# Altium PCB WT-312.pcbdoc
Units mm, origin at the board's own origin, x right, y up, seen from the top; angles counter-clockwise.
Board outline 50 x 25 mm, 2 copper layers (Top Layer, Bottom Layer); 40 components, 26 nets, 105 pads, 36 vias.
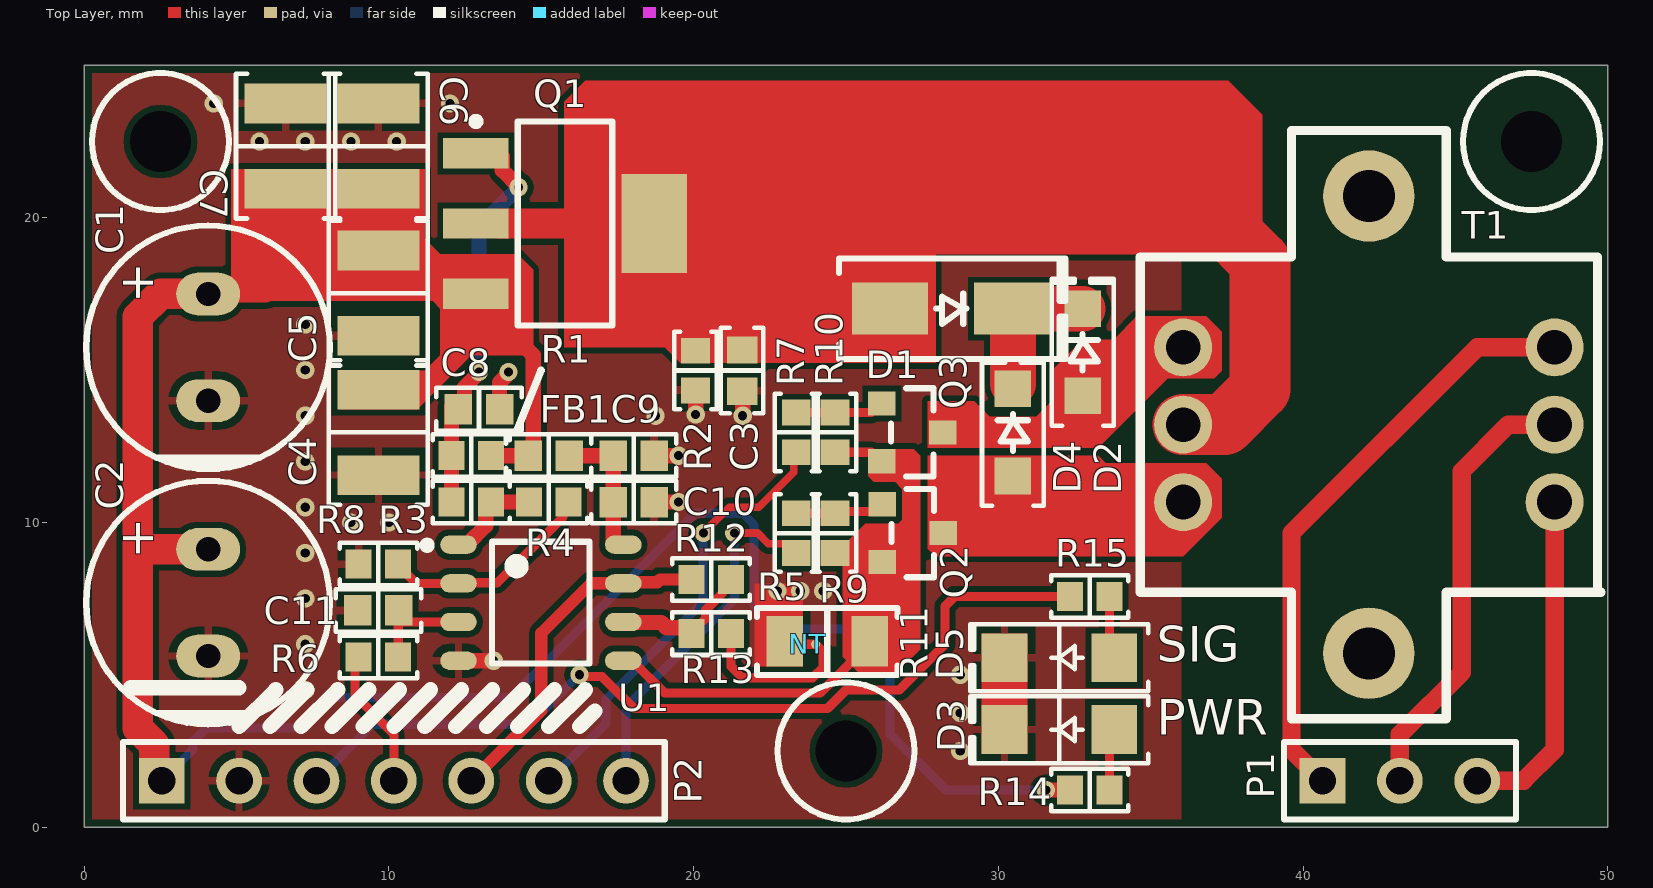
[diagram p0: Top Layer view]
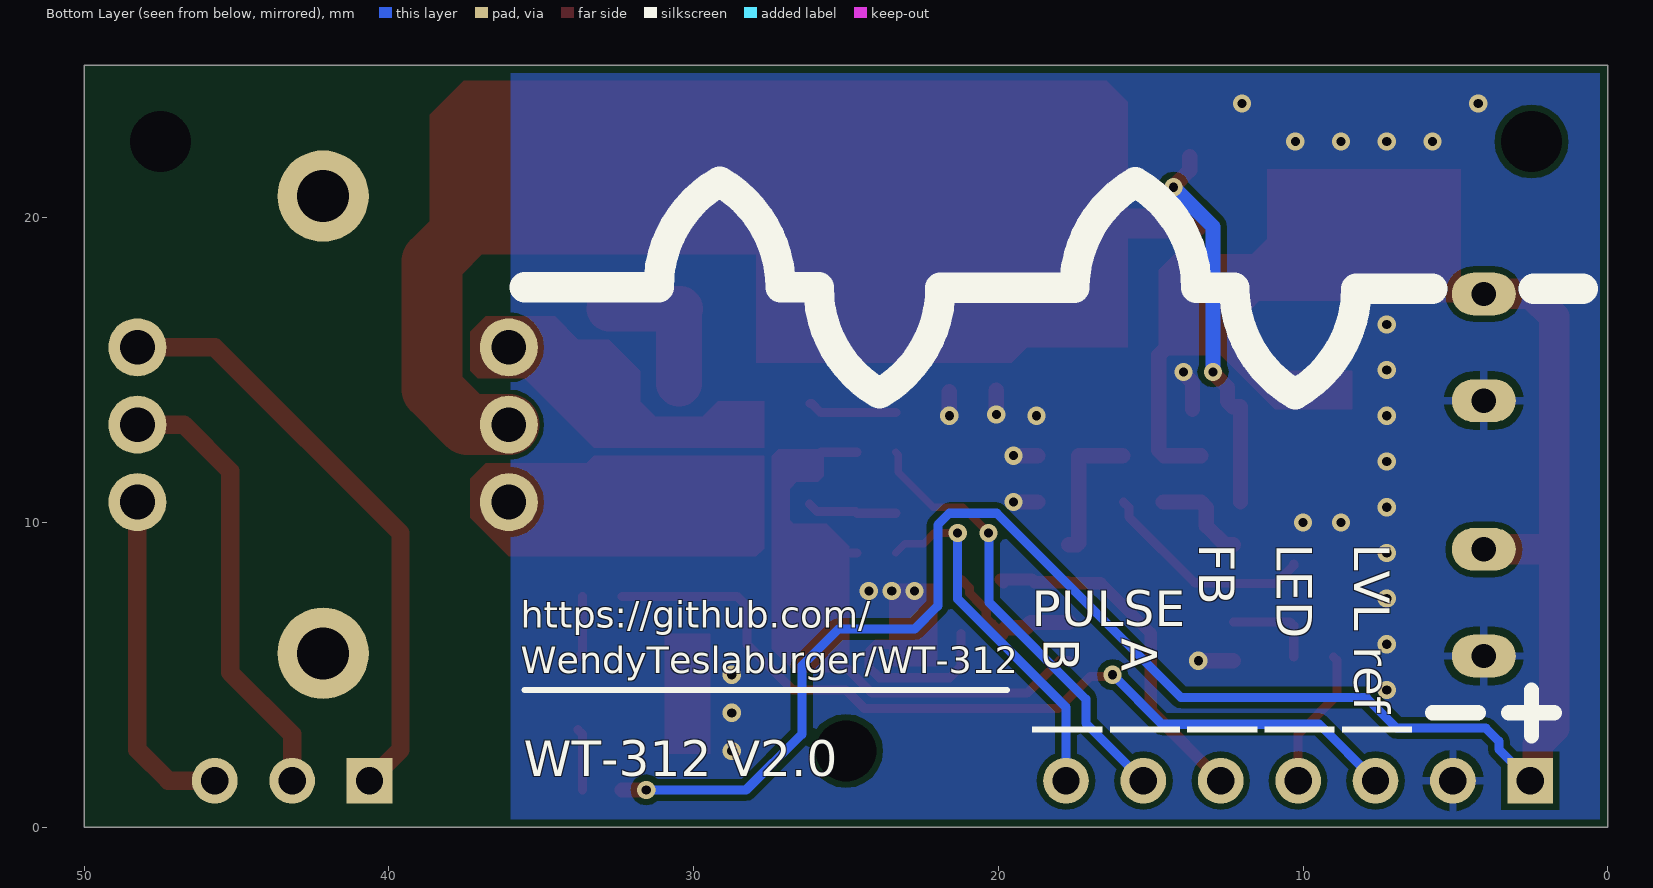
[diagram p1: Bottom Layer view, seen from below]
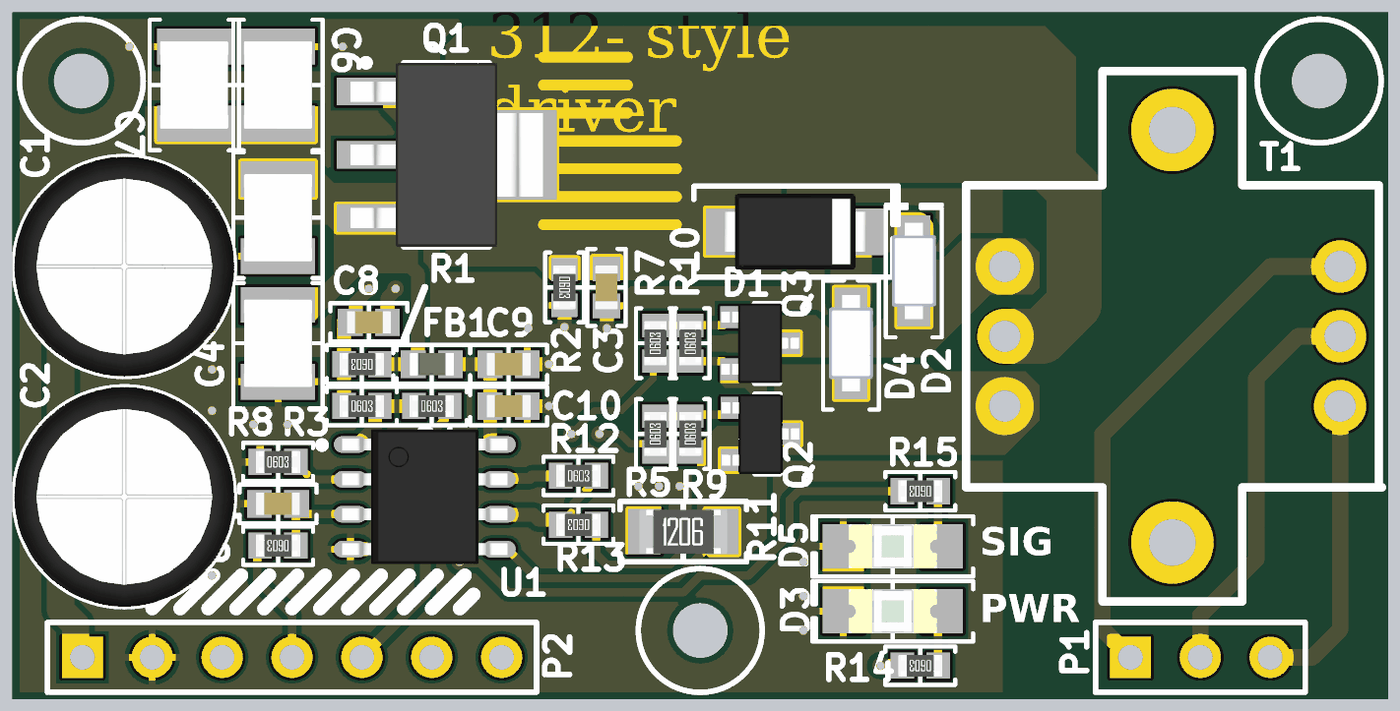
[diagram p2: 3D render of the assembled board from above, using the file's embedded part models]

## Layer stack, top to bottom
Top Solder: solder mask 0.0102, Solder Resist, Dk 3.5
Top Layer: signal copper 0.0356
Dielectric 1: dielectric 0.32, FR-4, Dk 4.8
Bottom Layer: signal copper 0.0356
Bottom Solder: solder mask 0.0102, Solder Resist, Dk 3.5

## Board outline
0,0 50,0 50,25 0,25

## Design rules (kind name [scope] priority, off if disabled: settings)
BoardOutlineClearance [All] p1: gap=0.25 ignorepadtopadclearanceinfootprint=FALSE
Clearance [All] p1: gap=0.2 ignorepadtopadclearanceinfootprint=FALSE
ComponentClearance ComponentClearance_1 [InComponent('T1')] p1: gap=0 collisioncheckmode=3 verticalgap=0 showdistances=FALSE
ComponentClearance ComponentClearance_2 [InComponent('NT')] p2: gap=0 collisioncheckmode=3 verticalgap=0 showdistances=FALSE
ComponentClearance [All] p3: gap=0.254 collisioncheckmode=3 verticalgap=0.254 showdistances=FALSE
MinimumSolderMaskSliver [All] p1: minsoldermaskwidth=0.2
PolygonConnect [All] p1: thpad.connectstyle=Relief thpad.reliefconductorwidth=0.254 thpad.reliefentries=4 thpad.polygonreliefangle="90 Angle" thpad.airgapwidth=0.254 smdpad.connectstyle=Relief smdpad.reliefconductorwidth=0.254 smdpad.reliefentries=4 smdpad.polygonreliefangle="90 Angle" smdpad.airgapwidth=0.254 via.connectstyle=Direct via.reliefconductorwidth=0.254 via.reliefentries=4 via.polygonreliefangle="90 Angle" via.airgapwidth=0.254
RoutingVias [All] p1: holewidth=0.711 width=1.27 viastyle="Through Hole" minholewidth=0.711 minwidth=1.27 maxholewidth=0.711 maxwidth=1.27
ShortCircuit ShortCircuit_1 [InComponent('NT')] p1: allowed=TRUE
ShortCircuit [All] p2: allowed=FALSE
SilkToSilkClearance [All] p1: silktosilkclearance=0
SilkToSolderMaskClearance [IsPad] p1: minsilkscreentomaskgap=0.1 clearancetoexposedcopper=TRUE
SolderMaskExpansion [All] p1: expansion=0.102 istentingtop=FALSE
Width [All] p1: maxlimit=2 minlimit=0.254 preferedwidth=0.254
25 further rules are at their usual default settings.

## Components (designator, comment, footprint, x,y, rotation, side; value= is the part's Value field where it differs from the comment)
C1 "470µF" "CAP TH ALUM ELEC D8.00mm S3.50mm H13.00mm" 4.064,15.748 r90 top
C2 "470µF" "CAP TH ALUM ELEC D8.00mm S3.50mm H13.00mm" 4.064,7.366 r90 top
C3 "0.1µF" "CAP 0603_1608" 21.59,14.986 r90 top
C4 "22µF" "CAP 1210_3225 - 2.8MM" 9.652,12.954 r90 top
C5 "22µF" "CAP 1210_3225 - 2.8MM" 9.652,17.526 r90 top
C6 "22µF" "CAP 1210_3225 - 2.8MM" 9.652,22.352 r270 top
C7 "22µF" "CAP 1210_3225 - 2.8MM" 6.604,22.352 r270 top
C8 "0.1µF" "CAP 0603_1608" 12.954,13.716 r180 top
C9 "0.1µF" "CAP 0603_1608" 18.034,12.192 r180 top
C10 "1µF" "CAP 0603_1608" 18.034,10.668 r180 top
C11 "1µF" "CAP 0603_1608" 9.652,7.112 r0 top
D1 "SML4746-E3/61" "DO214AC SMA" 28.448,17.018 r0 top
D2 "DSS14UTR" SOD123F 32.766,15.588 r90 top
D3 "Green" "LED 1206_3216 GREEN" 32,3.2 r180 top
D4 "DSS14UTR" SOD123F 30.48,12.954 r90 top
D5 "Green" "LED 1206_3216 GREEN" 32,5.563 r180 top
FB1 "100 Ohms @ 100MHz" "FER 0603_1608" 15.24,12.192 r0 top
NT "NetTie 0.3mm" NetTie0.3mm 23.75,6 r180 top
P1 "Header 3" HDR1X3 40.64,1.524 r0 top
P2 "Header 7" HDR1X7 2.54,1.524 r0 top
Q1 "NTF2955" SOT230P700X175-4N 15.777,19.812 r0 top
Q2 "DMN2041L-7" "DIODES SOT-23-3" 27.194,9.652 r0 top
Q3 "DMN2041L-7" "DIODES SOT-23-3" 27.178,12.954 r0 top
R1 "1 kOhms" "RES 0603_1608" 12.7,12.192 r180 top
R2 "1 kOhms" "RES 0603_1608" 20.066,14.986 r270 top
R3 "1 kOhms" "RES 0603_1608" 12.7,10.668 r0 top
R4 "1 kOhms" "RES 0603_1608" 15.24,10.668 r0 top
R5 "10 Ohms" "RES 0603_1608" 23.368,9.652 r90 top
R6 "10 kOhms" "RES 0603_1608" 9.652,5.588 r180 top
R7 "10 Ohms" "RES 0603_1608" 23.368,12.954 r90 top
R8 "10 kOhms" "RES 0603_1608" 9.652,8.636 r0 top
R9 "10 kOhms" "RES 0603_1608" 24.638,9.652 r90 top
R10 "10 kOhms" "RES 0603_1608" 24.638,12.954 r90 top
R11 "100 mOhms" "RES 1206_3216" 24.384,6.096 r0 top
R12 "100 kOhms" "RES 0603_1608" 20.574,8.128 r0 top
R13 "10 kOhms" "RES 0603_1608" 20.574,6.35 r180 top
R14 "560 Ohms" "RES 0603_1608" 33,1.219 r180 top
R15 "560 Ohms" "RES 0603_1608" 33,7.569 r180 top
T1 "42TL004" 42TL-Series 42.164,13.208 r0 top
U1 "LMC64822" SOIC127P490X175-8N 14.986,7.366 r0 top

## Footprints (in the part's own frame and the unit in brackets; to place one, negate y for a bottom-side part, rotate by r counter-clockwise, add the part's x,y. Pads: shape width x height; smd on the part's side, far side on the other; paste and mask are expansions set on the pad)
42TL-Series [mil] "Miniature transformers"
  round 75 hole 45: 1(-240,100) 2(-240,0) 3(-240,-100) 4(240,-100) 5(240,0) 6(240,100)
  round 118.11 hole 66.93: MC1(0,-295.5) MC2(0,295.5)
  silkscreen extent -296,-380 300,380
"CAP 0603_1608" [mm] "Chip Capacitor, 2-Leads, Body 1.60x0.80mm, IPC Medium Density"
  rect 0.9x1 smd: 1(-0.675,0) 2(0.675,0)
  silkscreen extent -1.4,-0.7 1.4,0.7, body extent -0.8,-0.41 0.8,0.41, height 0.82
"CAP 1210_3225 - 2.8MM" [mm] "Chip Capacitor, 2-Leads, Body 3.20x2.50mm, IPC Medium Density"
  rect 1.3x2.7 smd: 1(-1.4,0) 2(1.4,0)
  silkscreen extent -2.37,-1.63 2.37,1.63, body extent -1.6,-1.25 1.6,1.25, height 2.8
"CAP TH ALUM ELEC D8.00mm S3.50mm H13.00mm" [mm] "8mm Diameter 3.5mm Lead Spacing Aluminum Electrolytic Capacitors Radial, Can"
  oval 1.4x2.1 hole 0.8: 1(1.75,0) 2(-1.75,0)
  silkscreen extent -4,-4 4,4, body extent -4.01,-4 4,4, height 13
"DIODES SOT-23-3" [mm] "SOT23, 3-Leads, Body 2.90x2.40mm, Pitch 0.95mm, IPC Medium Density"
  rect 0.9x0.8 smd: 1(-1,0.95) 2(-1,-0.95) 3(1,0)
  silkscreen extent -0.7,-1.45 0.7,1.45, body extent -1.41,-1.45 1.41,1.45, height 1.5
"DO214AC SMA" [mm] "Molded Diode, 2-Leads, Body 4.30x2.60mm, IPC Medium Density"
  rect 2.5x1.7 smd: 1(-2,0) 2(2,0)
  silkscreen extent -3.68,-1.65 3.75,1.65, body extent -2.6,-1.37 2.6,1.37, height 2.4
"FER 0603_1608" [mm] "Chip Ferrite, 2-Leads, Body 1.60x0.80mm, IPC Medium Density"
  rect 0.9x1 smd: 1(-0.675,0) 2(0.675,0)
  silkscreen extent -1.4,-0.7 1.4,0.7, body extent -0.8,-0.41 0.8,0.41, height 0.82
HDR1X3 [mm] "Connector; Header; 3 Position"
  rect 1.5x1.5 hole 0.9: 1(0,0)
  round 1.5 hole 0.9: 2(2.54,0) 3(5.08,0)
  silkscreen extent -1.27,-1.27 6.35,1.27
HDR1X7 [mm] "Connector; Header; 7 Position"
  rect 1.5x1.5 hole 0.9: 1(0,0)
  round 1.5 hole 0.9: 2(2.54,0) 3(5.08,0) 4(7.62,0) 5(10.16,0) 6(12.7,0) 7(15.24,0)
  silkscreen extent -1.27,-1.27 16.51,1.27
"LED 1206_3216 GREEN" [mm] "Chip Diode, 2-Leads, Body 3.13x1.55mm, IPC Medium Density"
  rect 1.5x1.6 smd: 1(-1.8,0) 2(1.8,0)
  silkscreen extent -2.92,-1.1 2.92,1.1, body extent -1.6,-0.8 1.6,0.8, height 0.9
NetTie0.3mm [mm]
  round 0.3 smd paste+0 mask+0: 1(-0.25,0) 2(0.25,0)
  Top Layer lines w0.3: 0.25,0 -0.25,0
"RES 0603_1608" [mm] "Chip Resistor, 2-Leads, Body 1.60x0.80mm, IPC Medium Density"
  rect 0.85x0.95 smd: 1(-0.65,0) 2(0.65,0)
  silkscreen extent -1.27,-0.7 1.27,0.7, body extent -0.8,-0.4 0.8,0.4, height 0.45
"RES 1206_3216" [mm] "Chip Resistor, 2-Leads, Body 3.13x1.55mm, IPC Medium Density"
  rect 1.2x1.65 smd: 1(-1.4,0) 2(1.4,0)
  silkscreen extent -2.3,-1.1 2.3,1.1, body extent -1.6,-0.8 1.6,0.8, height 0.6
SOD123F [mm] "SODFL, 2-Leads, Body 1.60x3.50mm, IPC Medium Density"
  rect 1.2x1.2 smd: 1(-1.43,0) 2(1.43,0)
  silkscreen extent -2.41,-1.02 2.41,1.02, body extent -1.75,-0.8 1.75,0.8, height 1.1
SOIC127P490X175-8N [mm] "SOIC, 8-Leads, Body 3.90x3.90mm, Pitch 1.27mm, IPC Medium Density"
  oval 1.2x0.6 smd: 1(-2.704,1.905) 2(-2.704,0.635) 3(-2.704,-0.635) 4(-2.704,-1.905) 5(2.704,-1.905) 6(2.704,-0.635) 7(2.704,0.635) 8(2.704,1.905)
  silkscreen extent -3.86,-2 1.6,2.01, body extent -3,-2.45 3,2.45, height 1.91
SOT230P700X175-4N [mm] "SOT223, 4-Leads, Body 6.50x7.00mm (avg), Pitch 2.30mm, IPC Medium Density"
  rect 2.15x1 smd: 1(-2.925,2.3) 2(-2.925,0) 3(-2.925,-2.3)
  rect 2.15x3.25 smd: 4(2.925,0)
  silkscreen extent -3.05,-3.35 1.55,3.47, body extent -3.5,-3.35 3.5,3.35, height 1.75

## Part data
C1 C2: library part 477CKE016M, "CAP ALUM 470UF 20% 16V RADIAL", Device Package="Radial, Can", ESR (Equivalent Series Resistance)="564.4mOhm @ 120Hz", Lifetime @ Temp.="2000 Hrs @ 105°C", Manufacturer="Illinois Capacitor", Operating Temperature="-40°C ~ 105°C", Ripple Current @ Low Frequency="365mA @ 120Hz", Supplier Part Number 1=1572-1744-ND, Tolerance=±20%, Voltage - Rated=16V, Applications="General Purpose", Capacitance=470µF, ComponentLink1Description=Datasheet, ComponentLink1URL=http://www.illinoiscapacitor.com/pdf/seriesDocuments/CKH_CKE%20series.pdf, ComponentLink2Description="DigiKey Link", ComponentLink2URL=http://digikey.com/product-detail/en/illinois-capacitor/477CKE016M/1572-1744-ND/5412869, Height - Seated (Max)="0.512\" (13.00mm)", LastUpdated="07/09/2020 05:24:52", Lead Spacing="0.138\" (3.50mm)", Lifecycle Status=Active, Minimum Order=1, Mounting Type="Through Hole", Package / Case="Radial, Can", Packaging=Bulk, Part Number=477CKE016M, Part Status=Active, PartId=23777, Polarization=Polar, Price=0.32, Series=CKE, Size / Dimension="0.315\" Dia (8.00mm)", Supplier 1=DigiKey
C3 C8 C9: library part C0603C104K5RAC7411, "CAP CER 0.1UF 50V X7R 0603", Device Package="0603 (1608 Metric)", Manufacturer=KEMET, Operating Temperature="-55°C ~ 125°C", Supplier Part Number 1=399-7374-2-ND, Temperature Coefficient=X7R, Tolerance=±10%, Voltage - Rated=50V, Applications="Bypass, Decoupling", Capacitance=0.1µF, ComponentLink1Description=Datasheet, ComponentLink1URL=https://api.kemet.com/component-edge/download/datasheet/C0603C104K5RAC7411.pdf, ComponentLink2Description="DigiKey Link", ComponentLink2URL=http://digikey.com/product-detail/en/kemet/C0603C104K5RAC7411/399-7374-2-ND/3317013, LastUpdated="02/09/2020 01:03:36", Lifecycle Status=Active, Minimum Order=15000, Mounting Type="Surface Mount, MLCC", Package / Case="0603 (1608 Metric)", Packaging=TapeAndReel, Part Number=C0603C104K5RAC7411, Part Status=Active, PartId=2233, Price=0.02, Series="SMD Comm X7R", Size / Dimension="0.063\" L x 0.031\" W (1.60mm x 0.80mm)", Supplier 1=DigiKey, Thickness (Max)="0.035\" (0.90mm)"
C4 C5 C6 C7: library part TMK325BJ226MM-T, "CAP CER 22UF 25V X5R 1210", Device Package="1210 (3225 Metric)", Manufacturer="Taiyo Yuden", Operating Temperature="-55°C ~ 85°C", Supplier Part Number 1=587-2086-1-ND, Temperature Coefficient=X5R, Tolerance=±20%, Voltage - Rated=25V, Applications="General Purpose", Capacitance=22µF, ComponentLink1Description=Datasheet, ComponentLink1URL=https://www.yuden.co.jp/productdata/catalog/mlcc01_e.pdf, ComponentLink2Description="DigiKey Link", ComponentLink2URL=http://digikey.com/product-detail/en/taiyo-yuden/TMK325BJ226MM-T/587-2086-1-ND/1789033, LastUpdated="02/09/2020 01:10:51", Lifecycle Status=Active, Minimum Order=1, Mounting Type="Surface Mount, MLCC", Package / Case="1210 (3225 Metric)", Packaging=TapeAndReel, Part Number=TMK325BJ226MM-T, Part Status=Active, PartId=23820, Price=0.29, Series=M, Size / Dimension="0.126\" L x 0.098\" W (3.20mm x 2.50mm)", Supplier 1=DigiKey, Thickness (Max)="0.106\" (2.70mm)"
C10 C11: library part TMJ107CB7105KAHR, "CAP CER 1UF 25V X7R 0603", Device Package="0603 (1608 Metric)", Manufacturer="Taiyo Yuden", Operating Temperature="-55°C ~ 125°C", Ratings=AEC-Q200, Supplier Part Number 1=587-4353-1-ND, Temperature Coefficient=X7R, Tolerance=±10%, Voltage - Rated=25V, Applications="Automotive, Boardflex Sensitive", Capacitance=1µF, ComponentLink1Description=Datasheet, ComponentLink1URL=https://www.yuden.co.jp/productdata/catalog//mlcc11_hq_e.pdf, ComponentLink2Description="DigiKey Link", ComponentLink2URL=http://digikey.com/product-detail/en/taiyo-yuden/TMJ107CB7105KAHR/587-4353-1-ND/5405550, Features="Soft Termination", LastUpdated="02/09/2020 01:03:31", Lifecycle Status=Active, Minimum Order=1, Mounting Type="Surface Mount, MLCC", Package / Case="0603 (1608 Metric)", Packaging=TapeAndReel, Part Number=TMJ107CB7105KAHR, Part Status=Active, PartId=4682, Price=0.04, Series=M, Size / Dimension="0.063\" L x 0.031\" W (1.60mm x 0.80mm)", Supplier 1=DigiKey, Thickness (Max)="0.035\" (0.90mm)"
D1: "DIODE ZENER 18V 1W DO214AC", Current - Reverse Leakage @ Vr="5µA @ 13.7V", Manufacturer="Vishay Semiconductor Diodes Division", Operating Temperature=150°C, Package / Case="DO-214AC, SMA", Power - Max=1W, Supplier Device Package="DO-214AC (SMA)", Supplier Part Number 1=SML4746-E3/61GICT-ND, Tolerance=±10%, Voltage - Zener (Nom) (Vz)=18V, ComponentLink1Description=Datasheet, ComponentLink1URL=//media.digikey.com/pdf/Data%20Sheets/Vishay%20Siliconix%20PDFs/SML4728-SML4764A.pdf, ComponentLink2Description="DigiKey Link", ComponentLink2URL=http://digikey.com/product-detail/en/vishay-semiconductor-diodes-division/SML4746-E3-61/SML4746-E3-61GICT-ND/8565238, Impedance (Max) (Zzt)="20 Ohms", LastUpdated="02/09/2020 01:19:18", Lifecycle Status=Active, Minimum Order=1, Mounting Type="Surface Mount", Packaging=TapeAndReel, Part Number=SML4746-E3/61, Part Status=Active, PartId=1538, Price=0.17, Series="Automotive, AEC-Q101", Supplier 1=DigiKey
D2 D4: "SCHOTTKY 40V SOD-123FL", Capacitance @ Vr, F="110pF @ 4V, 1MHz", Current - Average Rectified (Io)=1A, Current - Reverse Leakage @ Vr="100µA @ 40V", Manufacturer="SMC Diode Solutions", Operating Temperature - Junction="-55°C ~ 150°C", Package / Case=SOD-123F, Supplier Device Package=SOD-123FL, Supplier Part Number 1=1655-1927-1-ND, Voltage - DC Reverse (Vr) (Max)=40V, Voltage - Forward (Vf) (Max) @ If="500mV @ 1A", ComponentLink1Description=Datasheet, ComponentLink1URL=http://www.smc-diodes.com/propdf/DSS12U%20THRU%20DSS125U%20N1873%20REV.A.pdf, ComponentLink2Description="DigiKey Link", ComponentLink2URL=http://digikey.com/product-detail/en/smc-diode-solutions/DSS14UTR/1655-1927-1-ND/8341869, Diode Type=Schottky, LastUpdated="02/09/2020 01:19:10", Lifecycle Status=Active, Minimum Order=1, Mounting Type="Surface Mount", Packaging=TapeAndReel, Part Number=DSS14UTR, Part Status=Active, PartId=2515, Price=0.03, Series=-, Speed="Fast Recovery =< 500ns, > 200mA (Io)", Supplier 1=DigiKey
D3 D5: library part APTD3216LCGCK, "LED GREEN CLEAR 2SMD", Current - Test=2mA, Device Package="1206 (3216 Metric)", Lens Color=Colorless, Manufacturer=Kingbright, Millicandela Rating=25mcd, Supplier Device Package=2-SMD, Supplier Part Number 1=754-2049-1-ND, Voltage - Forward (Vf) (Typ)=1.9V, Color=Green, ComponentLink1Description=Datasheet, ComponentLink1URL=http://www.kingbrightusa.com/images/catalog/SPEC/APTD3216LCGCK.pdf, ComponentLink2Description="DigiKey Link", ComponentLink2URL=http://digikey.com/product-detail/en/kingbright/APTD3216LCGCK/754-2049-1-ND/7043101, Configuration=Standard, Height (Max)=1.90mm, LastUpdated="02/09/2020 01:20:47", Lens Size="1.60mm Dia", Lens Style="Round with Domed Top", Lens Transparency=Clear, Lifecycle Status=Active, Minimum Order=1, Mounting Type="Surface Mount", Package / Case="1206 (3216 Metric)", Packaging=TapeAndReel, Part Number=APTD3216LCGCK, Part Status=Active, PartId=541, Price=0.10, Series=-, Size / Dimension="3.20mm L x 1.60mm W", Supplier 1=DigiKey, Viewing Angle=40°, Wavelength - Dominant=570nm, Wavelength - Peak=574nm
FB1: library part BLM18KG101TN1D, "FERRITE BEAD 100 OHM 0603 1LN", Current Rating (Max)=3A, DC Resistance (DCR) (Max)=30mOhm, Device Package="0603 (1608 Metric)", Manufacturer="Murata Electronics", Operating Temperature="-55°C ~ 125°C", Supplier Part Number 1=490-5448-1-ND, ComponentLink1Description=Datasheet, ComponentLink1URL=//media.digikey.com/pdf/Data%20Sheets/Murata%20PDFs/BLM18yyyyyyN1x.pdf, ComponentLink2Description="DigiKey Link", ComponentLink2URL=http://digikey.com/product-detail/en/murata-electronics/BLM18KG101TN1D/490-5448-1-ND/2260755, Filter Type="Power Line", Height (Max)="0.030\" (0.75mm)", Impedance @ Frequency="100 Ohms @ 100MHz", LastUpdated="02/09/2020 01:18:17", Lifecycle Status=Active, Minimum Order=1, Mounting Type="Surface Mount", Number of Lines=1, Package / Case="0603 (1608 Metric)", Packaging=TapeAndReel, Part Number=BLM18KG101TN1D, Part Status=Active, PartId=1071, Price=0.02, Series="EMIFIL®, BLM18", Size / Dimension="0.063\" L x 0.032\" W (1.60mm x 0.80mm)", Supplier 1=DigiKey
NT: library part NetTie_0.3mm
P1: "Header, 3-Pin", LatestRevisionDate=17-Jul-2002, LatestRevisionNote="Re-released for DXP Platform.", Publisher="Altium Limited"
P2: "Header, 7-Pin", LatestRevisionDate=17-Jul-2002, LatestRevisionNote="Re-released for DXP Platform.", Publisher="Altium Limited"
Q1: "Single, P-Channel, SOT-223 -60 V, -2.6 A", Supplier Part Number 1=863-NTF2955T1G, Price=0.855, Supplier 1=Mouser
Q2 Q3: "MOSFET N-CH 20V 6.4A SOT23", Current - Continuous Drain (Id) @ 25°C="6.4A (Ta)", Drain to Source Voltage (Vdss)=20V, Drive Voltage (Max Rds On,  Min Rds On)="2.5V, 4.5V", Input Capacitance (Ciss) (Max) @ Vds="550pF @ 10V", Manufacturer="Diodes Incorporated", Operating Temperature="-55°C ~ 150°C (TJ)", Package / Case="TO-236-3, SC-59, SOT-23-3", Power Dissipation (Max)="780mW (Ta)", Supplier Device Package=SOT-23-3, Supplier Part Number 1=DMN2041L-7DICT-ND, ComponentLink1Description=Datasheet, ComponentLink1URL=https://www.diodes.com/assets/Datasheets/products_inactive_data/DMN2041L.pdf, ComponentLink2Description="DigiKey Link", ComponentLink2URL=http://digikey.com/product-detail/en/diodes-incorporated/DMN2041L-7/DMN2041L-7DICT-ND/2182586, FET Type=N-Channel, Gate Charge (Qg) (Max) @ Vgs="15.6nC @ 10V", LastUpdated="02/09/2020 01:25:02", Lifecycle Status=Active, Minimum Order=1, Mounting Type="Surface Mount", Packaging=TapeAndReel, Part Number=DMN2041L-7, Part Status=Active, Price=0.08, Rds On (Max) @ Id, Vgs="28mOhm @ 6A, 4.5V", Series=-, Supplier 1=DigiKey, Technology="MOSFET (Metal Oxide)", Vgs (Max)=±12V, Vgs(th) (Max) @ Id="1.2V @ 250µA"
R1 R2 R3 R4: library part CRCW06031K00FKTA, "RES SMD 1K OHM 1% 1/10W 0603", Device Package="0603 (1608 Metric)", Manufacturer="Vishay Dale", Operating Temperature="-55°C ~ 155°C", Power (Watts)="0.1W, 1/10W", Ratings=AEC-Q200, Supplier Device Package=0603, Supplier Part Number 1=541-2987-1-ND, Temperature Coefficient=±100ppm/°C, Tolerance=±1%, ComponentLink1Description=Datasheet, ComponentLink1URL=http://www.vishay.com/docs/20008/dcrcw.pdf, ComponentLink2Description="DigiKey Link", ComponentLink2URL=http://digikey.com/product-detail/en/vishay-dale/CRCW06031K00FKTA/541-2987-1-ND/6073630, Composition="Thick Film", Features="Automotive AEC-Q200", Height - Seated (Max)="0.020\" (0.50mm)", LastUpdated="02/09/2020 01:09:58", Lifecycle Status=Active, Minimum Order=1, Number of Terminations=2, Package / Case="0603 (1608 Metric)", Packaging=TapeAndReel, Part Number=CRCW06031K00FKTA, Part Status=Active, PartId=17528, Price=0.01, Resistance="1 kOhms", Series=CRCW, Size / Dimension="0.063\" L x 0.033\" W (1.60mm x 0.85mm)", Supplier 1=DigiKey
R5 R7: library part AC0603FR-0710RL, "RES SMD 10 OHM 1% 1/10W 0603", Device Package="0603 (1608 Metric)", Manufacturer=Yageo, Operating Temperature="-55°C ~ 155°C", Power (Watts)="0.1W, 1/10W", Ratings=AEC-Q200, Supplier Device Package=0603, Supplier Part Number 1=311-10LDCT-ND, Temperature Coefficient=±200ppm/°C, Tolerance=±1%, ComponentLink1Description=Datasheet, ComponentLink1URL=https://www.yageo.com/upload/media/product/productsearch/datasheet/rchip/PYu-AC_51_RoHS_L_7.pdf, ComponentLink2Description="DigiKey Link", ComponentLink2URL=http://digikey.com/product-detail/en/yageo/AC0603FR-0710RL/311-10LDCT-ND/2828514, Composition="Thick Film", Features="Automotive AEC-Q200, Moisture Resistant", Height - Seated (Max)="0.022\" (0.55mm)", LastUpdated="02/09/2020 01:10:18", Lifecycle Status=Active, Minimum Order=1, Number of Terminations=2, Package / Case="0603 (1608 Metric)", Packaging=TapeAndReel, Part Number=AC0603FR-0710RL, Part Status=Active, PartId=8121, Price=0.01, Resistance="10 Ohms", Series=AC, Size / Dimension="0.063\" L x 0.031\" W (1.60mm x 0.80mm)", Supplier 1=DigiKey
R6 R8 R9 R10 R13: library part RN73H1JTTD1002F100, "RES 10K OHM 1% 1/10W 0603", Device Package="0603 (1608 Metric)", Manufacturer="KOA Speer Electronics, Inc.", Operating Temperature="-55°C ~ 155°C", Power (Watts)="0.1W, 1/10W", Ratings=AEC-Q200, Supplier Device Package=0603, Supplier Part Number 1=2019-RN73H1JTTD1002F100CT-ND, Temperature Coefficient=±100ppm/°C, Tolerance=±1%, ComponentLink2Description="DigiKey Link", ComponentLink2URL=http://digikey.com/product-detail/en/koa-speer-electronics-inc/RN73H1JTTD1002F100/2019-RN73H1JTTD1002F100CT-ND/10707129, Composition="Metal Film", Features="Automotive AEC-Q200, Moisture Resistant", Height - Seated (Max)="0.022\" (0.55mm)", LastUpdated="02/09/2020 01:09:24", Lifecycle Status=Active, Minimum Order=1, Number of Terminations=2, Package / Case="0603 (1608 Metric)", Packaging=TapeAndReel, Part Number=RN73H1JTTD1002F100, Part Status=Active, PartId=26823, Price=0.06, Resistance="10 kOhms", Series=RN73H, Size / Dimension="0.063\" L x 0.031\" W (1.60mm x 0.80mm)", Supplier 1=DigiKey
R11: library part SCRR1206S1-R100F, "RES 0.1 OHM 1% 1W 1206", Device Package="1206 (3216 Metric)", Manufacturer="Delta Electronics/Cyntec", Operating Temperature="-55°C ~ 155°C", Power (Watts)=1W, Supplier Device Package=1206, Supplier Part Number 1=2037-SCRR1206S1-R100FCT-ND, Temperature Coefficient=±100ppm/°C, Tolerance=±1%, ComponentLink2Description="DigiKey Link", ComponentLink2URL=http://digikey.com/product-detail/en/delta-electronics-cyntec/SCRR1206S1-R100F/2037-SCRR1206S1-R100FCT-ND/10446103, Composition="Thick Film", Features="Current Sense", Height - Seated (Max)="0.033\" (0.85mm)", LastUpdated="02/09/2020 01:13:07", Lifecycle Status=Active, Minimum Order=1, Number of Terminations=2, Package / Case="1206 (3216 Metric)", Packaging=TapeAndReel, Part Number=SCRR1206S1-R100F, Part Status=Active, PartId=27736, Price=0.14, Resistance="100 mOhms", Series=SCRR, Size / Dimension="0.126\" L x 0.063\" W (3.20mm x 1.60mm)", Supplier 1=DigiKey
R12: library part CRCW0603100KFKEA, "RES SMD 100K OHM 1% 1/10W 0603", Device Package="0603 (1608 Metric)", Manufacturer="Vishay Dale", Operating Temperature="-55°C ~ 155°C", Power (Watts)="0.1W, 1/10W", Ratings=AEC-Q200, Supplier Device Package=0603, Supplier Part Number 1=541-100KHCT-ND, Temperature Coefficient=±100ppm/°C, Tolerance=±1%, ComponentLink1Description=Datasheet, ComponentLink1URL=http://www.vishay.com/docs/20035/dcrcwe3.pdf, ComponentLink2Description="DigiKey Link", ComponentLink2URL=http://digikey.com/product-detail/en/vishay-dale/CRCW0603100KFKEA/541-100KHCT-ND/1180038, Composition="Thick Film", Features="Automotive AEC-Q200", Height - Seated (Max)="0.020\" (0.50mm)", LastUpdated="02/09/2020 01:09:36", Lifecycle Status=Active, Minimum Order=1, Number of Terminations=2, Package / Case="0603 (1608 Metric)", Packaging=CutTape, Part Number=CRCW0603100KFKEA, Part Status=Active, PartId=24639, Price=0.10, Resistance="100 kOhms", Series=CRCW, Size / Dimension="0.061\" L x 0.033\" W (1.55mm x 0.85mm)", Supplier 1=DigiKey
R14 R15: library part CR0603-FX-5600ELF, "RES SMD 560 OHM 1% 1/10W 0603", Device Package="0603 (1608 Metric)", Manufacturer="Bourns Inc.", Operating Temperature="-55°C ~ 155°C", Power (Watts)="0.1W, 1/10W", Supplier Device Package=0603, Supplier Part Number 1=CR0603-FX-5600ELFCT-ND, Temperature Coefficient=±100ppm/°C, Tolerance=±1%, ComponentLink1Description=Datasheet, ComponentLink1URL=https://www.bourns.com/docs/Product-Datasheets/CHPREZTR.pdf, ComponentLink2Description="DigiKey Link", ComponentLink2URL=http://digikey.com/product-detail/en/bourns-inc/CR0603-FX-5600ELF/CR0603-FX-5600ELFCT-ND/3925324, Composition="Thick Film", Features="Moisture Resistant", Height - Seated (Max)="0.022\" (0.55mm)", LastUpdated="02/09/2020 01:09:54", Lifecycle Status=Active, Minimum Order=1, Number of Terminations=2, Package / Case="0603 (1608 Metric)", Packaging=CutTape, Part Number=CR0603-FX-5600ELF, Part Status=Active, PartId=19135, Price=0.10, Resistance="560 Ohms", Series=CR0603, Size / Dimension="0.063\" L x 0.031\" W (1.60mm x 0.80mm)", Supplier 1=DigiKey
T1: library part 42LT004, "Miniature audio transformer", ComponentLink1Description=Supplier, ComponentLink1URL=https://www.mouser.be/ProductDetail/Xicon/42TL004-RC?qs=%252BLh6ltJumVRX87vpOY3zCA%3D%3D, ComponentLink2Description=Datasheet, ComponentLink2URL=https://www.mouser.be/datasheet/2/449/Yuetone_XC-600127-1212403.pdf
U1: "CMOS Dual Rail-to-Rail Input and Output Operational Amplifier", Supplier Part Number 1=511-LMC6482IDT, Price=0.847, Supplier 1=Mouser

## Free pads (board coordinates)
  round 0 hole 2 unplated: 2(2.5,22.5) 2(25,2.5) 3(47.5,22.5)

## Via types
v1: diameter 0.6, hole 0.3, Top Layer to Bottom Layer, tented both sides, 36 vias

## Nets (pads, with @x,y where several pads share a name; then routed paths per layer and width w, separated by ;. In a path a pad name is that pad's centre, name@x,y a point inside that pad or via, vN(x,y) a via of type N, cw(c..) or ccw(c..) an arc to the next point about the centre after c; other vN are vias at no path point)
+9V: C1.1 C2.1 C4.2 C5.2 C6.2 C7.2 FB1.1 P2.1 Q1.3 R1.1 R14.2 | length 68.2
  Top Layer w0.5: R1.1 FB1.1 14.732,12.359 14.732,14.75 14.732,15.494 14.224,16.002 ; v1(31.558,1.219) R14.2
  Top Layer w0.8: C1.1 4.179,17.613 5.929,17.613 6.096,17.78
  Top Layer w1: 1.75,9.116 C2.1 ; P2.1 2.29,1.774 2.29,2.71 1.75,3.25 1.75,16.75 2.5,17.5 4.062,17.5 C1.1
  Bottom Layer w0.3: P2.1 3.57,2.554 3.57,2.82 4,3.25 6.919,3.25 7.919,4.25 13.999,4.25 20.051,10.302 21.605,10.302 21.986,9.921 21.986,7.264 22,7.25 22.75,6.5 25.25,6.5 26.45,5.3 26.45,3.05 28.281,1.219 v1(31.558,1.219)
GND: C1.2 C2.2 C3.1 C4.1 C5.1 C6.1 C7.1 C8.1 C9.1 C10.1 C11.1 D3.2 D5.2 NT.2 P2.2 R2.2 R8.1 R11.1 U1.4 | length 5.8
  Top Layer w0.254: C3.1 C3.1@21.608,14.293 ; 30.146,4.436 30.2,4.381
  Top Layer w0.5: U1.4 v1(13.434,5.461) ; C8.1 13.629,14.597 13.924,14.892 v1(13.924,14.94) ; C10.1 C10.1 19.498,10.669 v1(19.499,10.67) ; C9.1 v1(19.501,12.192) ; v1(20.066,13.544) R2.2 ; v1(21.608,13.5) C3.1@21.608,14.293
  other v1: 28.75,2.5 28.75,3.75 7.25,4.5 28.75,5 7.25,6 7.25,7.5 22.75,7.75 23.5,7.75 24.25,7.75 7.25,9 8.75,10 10,10 7.25,10.5 7.25,12 7.25,13.5 18.75,13.5 7.25,15 7.25,16.5 5.75,22.5 7.25,22.5 8.75,22.5 10.25,22.5 4.25,23.75 12,23.75
I_FB: P2.5 R12.1 U1.7 | length 11.6
  Top Layer w0.4: P2.5 15,3.824 15,6.364 16.637,8.001 U1.7 17.728,8.039 18.81,8.039 18.899,8.128 R12.1 R12.1@19.835,8.039
LVL: P2.4 R6.2 | length 4.6
  Top Layer w0.3: R6.2 8.89,5.476 8.89,4.318 10.16,3.048 P2.4
NetC3_2: C3.2 D1.1 Q1.2 Q1.4 R2.1 T1.2 | length 15.1
  Top Layer w1: Q1.2@13.614,19.812 16.256,19.812
  Top Layer w2: 19.914,19.812 20.422,19.304 ; 25.908,19.558 26.198,19.268 26.198,17.168 26.348,17.018 D1.1 ; T1.2 37.42,13.208 38.592,14.38 38.592,18.558 37.338,19.812
NetC8_2: C8.2 Q1.1 R1.2 R3.1 | length 12.6
  Top Layer w0.5: R3.1 R1.2 C8.2@12.05,13.8 ; C8.2@12.079,13.8 12.313,13.8 12.479,13.966 12.479,14.438 12.954,14.913 v1(12.954,14.94) ; Q1.1@13.716,22.01 13.716,21.561 14.25,21.027 v1(14.25,21)
  Bottom Layer w0.5: v1(12.954,14.94) 12.954,19.704 v1(14.25,21)
NetC11_2: C11.2 R6.1 U1.3 | length 3.1
  Top Layer w0.3: R6.1 10.302,6.612 10.421,6.731 U1.3
NetD1_2: D1.2 D2.2 D4.2 | length 4.8
  Top Layer w1.5: D4.2@30.48,14.555 30.48,16.986 D1.2 D2.2
NetD2_1: D2.1 Q3.3 T1.1 | length 1
  Top Layer w1: D2.1@32.672,14.064 D2.1 ; T1.1@35.293,15.575 35.895,15.575 T1.1
NetD3_1: D3.1 R14.1 | length 2
  Top Layer w0.3: R14.1 33.65,3.05 D3.1
NetD4_1: D4.1 Q2.3 T1.3
NetD5_1: D5.1 R15.1 | length 2.1
  Top Layer w0.3: R15.1 33.65,5.713 D5.1
NetP1_1: P1.1 T1.6 | length 19.7
  Top Layer w0.6: P1.1 39.624,2.54 39.624,9.652 45.72,15.748 T1.6
NetP1_2: P1.2 T1.5 | length 14.7
  Top Layer w0.6: P1.2 43.18,3.048 45.212,5.08 45.212,11.684 46.736,13.208 T1.5
NetP1_3: P1.3 T1.4 | length 11.1
  Top Layer w0.6: P1.3 47.244,1.524 48.26,2.54 T1.4
NetP2_3: P2.3 R15.2 | length 28.9
  Top Layer w0.3: v1(16.25,5) 16.307,4.943 16.989,4.943 18.04,3.892 24.392,3.892 25,4.5 26.75,4.5 28.25,6 28.25,7.25 28.569,7.569 R15.2
  Bottom Layer w0.3: P2.3 9.473,3.377 14.627,3.377 v1(16.25,5)
NetQ2_1: Q2.1 R5.2 R9.2 | length 3
  Top Layer w0.3: R5.2 R9.2 24.691,10.355 25.947,10.355 Q2.1
NetQ3_1: Q3.1 R7.2 R10.2 | length 2.9
  Top Layer w0.3: R7.2 R10.2 25.828,13.604 26.128,13.904 Q3.1
NetR3_2: R3.2 R4.1 U1.1 | length 3.2
  Top Layer w0.5: U1.1 12.555,9.271 13.175,9.891 13.175,10.493 R3.2 R4.1
NetR4_2: R4.2 R8.2 U1.2 | length 7.2
  Top Layer w0.3: R8.2 10.302,8.586 10.887,8.001 U1.2 12.301,8.02 13.555,8.02 15.715,10.18 15.715,10.493 R4.2
NetR12_2: R12.2 R13.2 U1.6 | length 4.7
  Top Layer w0.3: R13.2 19.924,6.4 20.199,6.675 20.219,6.675 20.395,6.851 20.395,7.128 20.753,7.486 20.753,7.49 20.949,7.686 20.949,7.853 R12.2
  Top Layer w0.5: U1.6 17.709,6.712 18.942,6.712 19.114,6.54 19.749,6.54 19.924,6.365 R13.2
PULSE_A: P2.6 R7.1 | length 14.7
  Top Layer w0.254: v1(20.32,9.652) 21.168,10.5 22.139,10.5 23.285,11.647 23.285,12.221 R7.1
  Bottom Layer w0.3: P2.6 17.126,3.41 17.126,4.203 20.305,7.381 20.305,9.637 v1(20.32,9.652)
PULSE_B: P2.7 R5.1 | length 11.9
  Top Layer w0.254: v1(21.336,9.652) 22.098,9.652 22.453,9.297 23.073,9.297 R5.1
  Bottom Layer w0.3: P2.7 17.78,3.932 21.336,7.488 v1(21.336,9.652)
V_AMP: C9.2 C10.2 FB1.2 U1.8 | length 4.7
  Top Layer w0.5: FB1.2 C9.2 C10.2 17.359,9.329 17.417,9.271 U1.8
V_SHUNT_N: NT.1 R13.1 | length 5.3
  Top Layer w0.3: R13.1 21.224,5.276 21.598,4.902 23.902,4.902 24.25,5.25 24.25,5.75 NT.1
V_SHUNT_P: Q2.2 Q3.2 R9.1 R10.1 R11.2 U1.5 | length 12.7
  Top Layer w0.3: U1.5 17.99,5.461 19.049,4.402 24.152,4.402 25.18,5.43 25.334,5.43 25.784,5.88 R11.2 ; R9.1 25.844,9.002 26.144,8.702 Q2.2 ; R10.1 25.828,12.304 26.128,12.004 Q3.2
pads on no net: T1.MC1 T1.MC2

## Polygon pours and split planes (outlines as drawn)
GND on Bottom Layer "GNDBOT" (solid, remove dead copper, pour order 2): 0,25 0,0 36,0 36,25
GND on Top Layer "GNDBOT" (solid, remove dead copper, pour order 0): 0,25 36,25 36,0 0,0

## Other copper
Top Layer:
  rectangle net GND: 22,5.271 23.584,8
  rectangle net GND: 29.45,2.4 30.95,6.363
  region net V_SHUNT_P: 25.728,12.404 27.22,12.404 27.432,12.192 27.432,5.842 26.67,5.08 25.4,5.08 24.892,5.588 24.892,7.874 24.892,9.221 25.628,9.957 26.721,9.957 26.853,10.089 26.853,11.095 26.619,11.328 25.908,11.328 25.728,11.508
  region net +9V: 4.826,21.59 4.826,17.272 11.43,17.272 11.684,17.018 14.478,17.018 14.732,17.272 14.732,18.288 14.224,18.796 11.684,18.796 11.176,19.304 11.176,21.59
  region net NetD4_1: 27.686,12.192 27.686,9.144 27.94,8.89 36.068,8.89 37.338,10.16 37.338,11.43 36.83,11.938 33.528,11.938 33.274,12.192
  region net NetD2_1: 27.686,13.97 29.21,13.97 29.718,13.462 31.242,13.462 31.75,13.97 31.75,14.986 32.766,16.002 33.782,16.002 34.544,16.764 36.83,16.764 37.338,16.256 37.338,14.986 37.084,14.732 35.56,14.732 33.274,12.446 27.686,12.446
  region net +9V: 8.382,14.986 11.176,14.986 11.684,15.494 11.684,18.288 14.732,18.288 14.732,15.494 12.7,15.494 10.922,13.716 8.382,13.716
  region net NetC3_2: 15.748,15.748 19.05,15.748 19.558,15.24 27.94,15.24 27.94,18.796 38.659,18.796 38.659,23.381 37.54,24.5 16.44,24.5 15.748,23.808

## Silkscreen, mask and mechanical layers (free items; w line width, h text height)
Top Overlay:
  circle w0.2: c47.5,22.5 r2.25
  circle w0.2: c25,2.5 r2.25
  circle w0.2: c2.5,22.5 r2.25
  lines w0.254: 14.218,13.058 14.986,14.986
  lines w0.5: 1.524,4.572 5.08,4.572 ; 5.08,3.302 6.285,4.507 ; 6.096,3.302 7.301,4.507 ; 7.112,3.302 8.317,4.507 ; 8.128,3.302 9.333,4.507 ; 9.144,3.302 10.349,4.507 ; 10.16,3.302 11.365,4.507 ; 11.176,3.302 12.381,4.507 ; 12.192,3.302 13.397,4.507 ; 13.208,3.302 14.413,4.507 ; 14.224,3.302 15.429,4.507 ; 15.24,3.302 16.445,4.507 ; 16.256,3.302 16.764,3.81
  text "SIG" at 35.204,5.029 h2
  text "PWR" at 35.204,2.642 h2
Bottom Overlay:
  rectangle: 6.419,3.103 8.72,3.303
  rectangle: 8.958,3.103 11.261,3.303
  rectangle: 11.5,3.1 13.801,3.302
  rectangle: 14.04,3.1 16.341,3.301
  rectangle: 16.575,3.1 18.9,3.3
  lines w0.2: 19.725,4.5 35.55,4.5
  lines w0.5: 1.75,3.75 3.25,3.75 ; 2.5,3 2.5,4.5 ; 4.25,3.75 5.75,3.75
  lines w1: 0.825,17.675 2.425,17.675 ; 5.75,17.675 8.25,17.675 ccw(c12.25,17.675) 10.25,14.211 ccw(c8.25,17.675) 12.25,17.675 ; 12.25,17.7 13.5,17.7 cw(c17.5,17.7) 15.5,21.164 cw(c13.5,17.7) 17.5,17.7 21.9,17.7 ccw(c25.9,17.7) 23.9,14.236 ccw(c21.9,17.7) 25.9,17.7 ; 25.9,17.725 27.15,17.725 cw(c31.15,17.725) 29.15,21.189 cw(c27.15,17.725) 31.15,17.725 35.55,17.725
  text "LVL ref" at 8.72,9.3 h2 r90
  text "LED" at 11.26,9.3 h2 r90
  text "FB" at 13.8,9.3 h2 r90
  text "A" at 16.34,6.2 h2 r90
  text "B" at 18.9,6.2 h2 r90
  text "PULSE" at 18.9,6.2 h2
  text "https://github.com/ / WendyTeslaburger/WT-312" at 35.675,4.75 h1.5
  text "WT-312 V2.0" at 35.575,1.275 h2
Top Solder:
  lines w0.4: 19.304,17.272 24.13,17.272 ; 19.304,18.288 24.13,18.288 ; 19.304,19.304 24.13,19.304 ; 19.304,20.32 24.13,20.32 ; 19.304,21.336 22.352,21.336 ; 19.304,22.352 22.352,22.352 ; 19.304,23.368 22.352,23.368
  text "312- style driver" at 17.3,19.3 h3.2
Mechanical 1:
  the board outline again, w0.3

## Dimensions
17.78,1.524 to 40.64,1.524 on Dimentions
25,2.5 to 0,0 on Dimentions
2.5,22.5 to 0,25 on Dimentions
2.5,22.5 to 0,25 on Dimentions
0,0 to 50,0 on Dimentions
0,25 to 0,0 on Dimentions

## Text inside footprints (layer, text, board x,y; h text height)
C1: Top Overlay "+" at 2.664,17.198 h2 r90
C2: Top Overlay "+" at 2.664,8.816 h2 r90